# Altium PCB TinyTOF-Body.PcbDoc (part 3 of 3)
Units mil, origin at the board's own origin, x right, y up, seen from the top; angles counter-clockwise.
Board outline 6000 x 4000 mil, 6 copper layers (Component Side, Ground Plane (GND), Inner Layer 1, Inner Layer 2, Power Plane (VCC), Solder Side), stack 62.6 mil thick; 146 components, 158 nets, 1020 pads, 350 vias.
Unrouted connection lines stored in the file: 339.
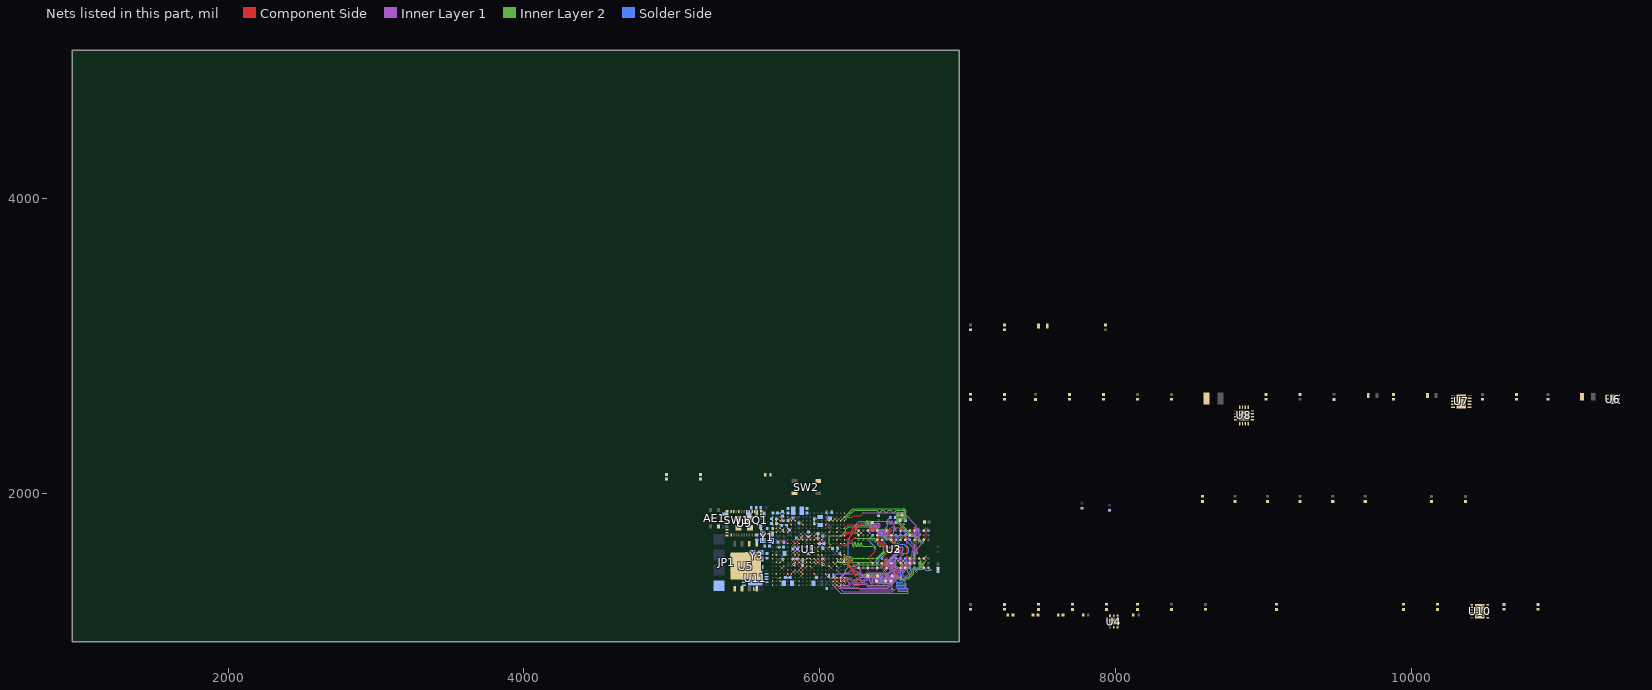
[diagram p7: the nets of this part, all layers, seen from the top]

## Via types
v1: diameter 12, hole 6, Component Side to Solder Side, tented both sides, 330 vias
v2: diameter 19.68, hole 7.87, Component Side to Solder Side, 12 vias
v3: diameter 19.68, hole 11.81, Component Side to Solder Side, 5 vias
v4: diameter 12, hole 6, Component Side to Solder Side, 3 vias

## Nets (pads, with @x,y where several pads share a name; then routed paths per layer and width w, separated by ;. In a path a pad name is that pad's centre, name@x,y a point inside that pad or via, vN(x,y) a via of type N, cw(c..) or ccw(c..) an arc to the next point about the centre after c; other vN are vias at no path point) (continued)
DRAM_D25: U1.B3 U3.F7 | length 911.7
  Component Side w5: U1.B3@6116.93,1407.48 v1(6129.73,1394.68)
  Inner Layer 1 w5: v1(6129.73,1394.68) 6135.72,1394.68 6158.22,1372.18 6197.18,1372.18 6221.5,1396.5 6313.91,1396.5 6329.91,1380.5 6458.23,1380.5 6529,1451.27 6529,1464.41 6546.09,1481.5 6556.5,1481.5 6580,1505 6580,1565 cw(c6585,1565) 6585,1570 cw(c6585,1565) 6590,1565 6590,1540 ccw(c6595,1540) 6595,1535 ccw(c6595,1540) 6600,1540 6600,1565 cw(c6605,1565) 6605,1570 cw(c6605,1565) 6610,1565 6610,1550 ccw(c6615,1550) 6615,1545 ccw(c6615,1550) 6620,1550 6620,1577.32 6627.5,1584.82 6627.5,1610.63 6633.5,1616.63 6633.5,1637.5 6630,1641 v1(6630,1640)
  Solder Side w5: U3.F7@6578.74,1687.99 6579.69,1687.99 6627.68,1640 v1(6630,1640)
DRAM_D26: U1.A3 U3.G2 | length 900
  Component Side w5: U1.A3@6116.93,1381.89 6116.93,1381.57 6133.5,1365 v1(6135,1365)
  Inner Layer 1 w5: v1(6135,1365) 6135,1363.5 6161,1337.5 6492.5,1337.5 v1(6515,1360)
  Solder Side w5: v1(6515,1360) 6580,1360 ccw(c6580,1365) 6585,1365 ccw(c6580,1365) 6580,1370 6524,1370 cw(c6524,1375) 6519,1375 cw(c6524,1375) 6524,1380 6580,1380 ccw(c6580,1385) 6585,1385 ccw(c6580,1385) 6580,1390 6525,1390 cw(c6525,1395) 6520,1395 cw(c6525,1395) 6525,1400 6555.19,1400 6572.5,1417.31 6572.5,1445.18 6563.97,1453.71 6563.97,1513.78 U3.G2@6547.24,1530.51
DRAM_D27: U1.C2 U3.H7 | length 884.7
  Component Side w5: U1.C2@6142.52,1433.07 v1(6155.32,1420.27)
  Inner Layer 1 w5: v1@6155,1420 6155,1415 6150,1410 6145,1410 6142.23,1412.77 6142.23,1427.23 6172.5,1457.5 6272.5,1457.5 6295,1435 6305,1435 6327.5,1457.5 6470.58,1457.5 6495,1481.92 6495,1540 cw(c6500,1540) 6500,1545 cw(c6500,1540) 6505,1540 6505,1505 ccw(c6510,1505) 6510,1500 ccw(c6510,1505) 6515,1505 6515,1555 6520,1560 6533.49,1560 6548.95,1575.46 6548.95,1575.73 6563.22,1590 v1(6565,1590)
  Solder Side w5: U3.H7@6515.75,1687.99 6515.75,1664.25 6522.78,1657.22 6570.1,1657.22 6584.82,1642.5 6597.5,1642.5 6602.5,1637.5 6602.5,1607.5 6592.5,1597.5 6569.82,1597.5 6565,1592.68 v1(6565,1590)
DRAM_D28: U1.A2 U3.H3 | length 896.6
  Component Side w5: U1.A2@6142.52,1381.89 6156.91,1367.5 6257.5,1367.5 v1(6275,1350)
  Inner Layer 1 w5: v1(6275,1350) 6485,1350 v1(6490,1355) v1@6492.32,1355
  Solder Side w5: v1@6492.32,1355 v1(6490,1355) 6490,1390 ccw(c6485,1390) 6485,1395 6415,1395 cw(c6415,1400) 6410,1400 cw(c6415,1400) 6415,1405 6488.5,1405 ccw(c6488.5,1410) 6493.5,1410 ccw(c6488.5,1410) 6488.5,1415 6415,1415 cw(c6415,1420) 6410,1420 cw(c6415,1420) 6415,1425 6475,1425 6510,1460 6510,1480 6500,1490 6500,1542.27 6515.75,1558.02 U3.H3@6515.75,1562.01
DRAM_D29: U1.C5 U3.H8 | length 886
  Component Side w5: U1.C5@6065.75,1433.07 v1(6078.54,1420.27)
  Inner Layer 1 w5: v1(6078.54,1420.27) 6078.54,1428.54 6083.37,1433.37 6135.64,1433.37 6168.77,1466.5 6196.5,1466.5 6207.5,1477.5 6247.5,1477.5 6257.5,1467.5 6275.23,1467.5 6297.73,1445 6302.27,1445 6323.77,1466.5 6466.85,1466.5 6485,1484.65 6485,1520 ccw(c6480,1520) 6480,1525 ccw(c6480,1520) 6475,1520 cw(c6470,1520) 6470,1515 ccw(c6470,1510) 6465,1510 6465,1500 cw(c6460,1500) 6460,1495 cw(c6460,1500) 6455,1500 6455,1516.87 6522.63,1584.5 6531.28,1593.14 6548.55,1593.14 6562.5,1607.09 6562.5,1619.82 6565.23,1622.55 6565.23,1632.91 6557.91,1640.23 6539.77,1640.23 6530,1650 6530,1665 v1(6535,1670)
  Solder Side w5: U3.H8@6515.75,1719.49 6532.48,1702.76 6532.48,1672.52 v1(6535,1670)
DRAM_D30: U1.B4 U3.F8 | length 909.9
  Component Side w5: U1.B4@6091.34,1407.48 v1(6104.13,1394.68)
  Inner Layer 1 w5: v1(6104.13,1394.68) 6121.32,1377.5 6140.18,1377.5 6155.18,1362.5 6465.68,1362.5 6547.5,1444.32 6547.5,1447.04 6567.5,1467.04 6647.5,1547.04 6647.5,1605.18 6652.5,1610.18 6652.5,1702.31 6630,1724.81 v1(6630,1735)
  Solder Side w5: U3.F8@6578.74,1719.49 6594.25,1735 v1(6630,1735)
DRAM_D31: U1.A4 U3.F2 | length 898.4
  Component Side w5: U1.A4@6091.34,1381.89 v1(6104.13,1369.09)
  Inner Layer 1 w5: v1(6104.13,1369.09) 6144.73,1328.5 6593.5,1328.5 ccw(c6593.5,1335) 6600,1335 ccw(c6595,1335) 6595,1340 6535,1340 cw(c6535,1345) 6530,1345 cw(c6535,1345) 6535,1350 6595,1350 ccw(c6595,1355) 6600,1355 ccw(c6595,1355) 6595,1360 6585,1360 cw(c6585,1365) 6580,1365 6580,1435 v1(6605,1460)
  Solder Side w5: U3.F2@6578.74,1530.51 6595.47,1513.78 6595.47,1469.53 v1(6605,1460)
DRAM_DQM0: U1.N1 U2.E7 | length 829.4
  Component Side w5: U1.N1@6168.11,1688.98 6168.11,1687.5 6186.64,1687.5 6204.71,1705.57 6204.71,1710.06 6245,1750.36 v1(6245,1755) ; v1(6590,1655) 6593.5,1651.5 6593.5,1578.74 U2.E7@6610.24,1562.01
  Inner Layer 1 w5: v1(6245,1755) 6251.5,1761.5 6251.5,1798.77 6267.23,1814.5 6450.5,1814.5 cw(c6450.5,1810) 6455,1810 6455,1800 ccw(c6460,1800) 6460,1795 ccw(c6460,1800) 6465,1800 6465,1809.5 cw(c6470,1809.5) 6470,1814.5 cw(c6470,1809.5) 6475,1809.5 6475,1800 ccw(c6480,1800) 6480,1795 ccw(c6480,1800) 6485,1800 6485,1809.5 cw(c6490,1809.5) 6490,1814.5 cw(c6490,1809.5) 6495,1809.5 6495,1800 ccw(c6500,1800) 6500,1795 cw(c6500,1790) 6505,1790 6505,1782.68 6507.5,1780.18 6507.5,1769.82 6505,1767.32 6505,1760 ccw(c6510,1760) 6510,1755 ccw(c6510,1760) 6515,1760 6515,1765 cw(c6520,1765) 6520,1770 6545.43,1770 6603.5,1711.93 6603.5,1698.34 6590,1684.84 v1(6590,1655)
DRAM_DQM1: U1.G2 U2.D3 | length 804.6
  Component Side w5: U1.G2@6142.52,1535.43 v1(6155.32,1522.64) ; v1(6640,1665) 6640,1685.18 U2.D3@6641.73,1686.91 ; U2.D3@6641.73,1682.64 U2.D3@6641.73,1686.91 ; U2.D3@6641.73,1687.99 U2.D3@6641.73,1686.91 ; U2.D3@6644.82,1690 U2.D3@6641.73,1686.91
  Inner Layer 2 w5: v1(6155.32,1522.64) 6197.32,1522.64 6209.82,1510.14 6220.18,1510.14 6229.54,1519.5 6434.5,1519.5 ccw(c6434.5,1525) 6440,1525 6440,1550 cw(c6445,1550) 6445,1555 cw(c6445,1550) 6450,1550 6450,1525 ccw(c6455,1525) 6455,1520 ccw(c6455,1525) 6460,1525 6460,1550 cw(c6465,1550) 6465,1555 cw(c6465,1550) 6470,1550 6470,1525 ccw(c6475,1525) 6475,1520 6507.82,1520 6507.82,1519.5 6524.82,1502.5 6571.59,1502.5 6645,1575.91 6645,1665 v1@6642.5,1665 ; v1(6640,1665) v1@6642.5,1665 ; v1@6642.68,1665.18 v1@6642.5,1665
DRAM_DQM2: U1.W1 U3.D3 | length 936.4
  Component Side w5: U1.W1@6168.11,1842.52 6222.5,1842.52 6222.5,1845.18 6229.82,1852.5 6277.5,1852.5 v1(6295,1870)
  Inner Layer 1 w5: v1(6295,1870) 6570,1870 6655,1785 6655,1765 cw(c6650,1765) 6650,1760 ccw(c6650,1755) 6645,1755 6645,1725 ccw(c6650,1725) 6650,1720 ccw(c6650,1725) 6655,1725 6655,1745 cw(c6660,1745) 6660,1750 ccw(c6660,1755) 6665,1755 6665,1760 cw(c6670,1760) 6670,1765 cw(c6670,1761) 6674,1761 6674,1744 cw(c6670,1744) 6670,1740 ccw(c6670,1735) 6665,1735 ccw(c6670,1735) 6670,1730 6680,1730 cw(c6680,1725) 6685,1725 cw(c6680,1725) 6680,1720 6670,1720 ccw(c6670,1715) 6665,1715 ccw(c6670,1715) 6670,1710 cw(c6670,1705) 6675,1705 6675,1682.32 6687.15,1670.18 6687.15,1659.82 6679.82,1652.5 6677.5,1650.18 6677.5,1644.82 6661.5,1628.82 6661.5,1601.5 v1(6660,1600)
  Solder Side w5: U3.D3@6641.73,1562.01 6641.73,1581.73 v1(6660,1600)
DRAM_DQM3: U1.C1 U3.E7 | length 888.3
  Component Side w5: U1.C1@6168.11,1433.07 6206.18,1395 6225,1395 6240,1410 6255,1410 cw(c6255,1405) 6260,1405 cw(c6255,1405) 6255,1400 6245,1400 ccw(c6245,1395) 6240,1395 ccw(c6245,1395) 6245,1390 6270,1390 cw(c6270,1385) 6275,1385 cw(c6270,1385) 6270,1380 v1(6230,1380)
  Inner Layer 1 w5: v1(6230,1380) 6237.5,1387.5 6310.18,1387.5 6326.18,1371.5 6461.96,1371.5 6538,1447.54 6538,1460.68 6549.82,1472.5 6560.18,1472.5 ; 6560.2,1472.47 6636.5,1548.77 6636.5,1606.91 6642.5,1612.91 6642.5,1645.18 6635.18,1652.5 6634.82,1652.5 6623.6,1663.72 v1(6623.6,1673.6)
  Solder Side w5: U3.E7@6610.24,1687.99 6610.24,1684.64 6623.6,1671.28 v1(6623.6,1673.6)
DRAM_DQS0_N: U1.P2 U2.G3 | length 813.4
  Component Side w5: U1.P2@6142.52,1714.57 6151.96,1714.57 6164.89,1727.5 6171.6,1727.5 6184.1,1740 6207.77,1740 6222.5,1754.73 6222.5,1764.32 6235.68,1777.5 6246.04,1777.5 6265.04,1796.5 6276.5,1796.5 v1(6280,1800) ; U2.G3@6547.24,1687.99 6547.62,1687.62 v1(6565,1705)
  Inner Layer 1 w5: v1(6280,1800) 6293.5,1786.5 6305.59,1786.5 6309.09,1790 6395,1790 cw(c6395,1785) 6400,1785 cw(c6395,1785) 6395,1780 6350,1780 ccw(c6350,1765) 6335,1765 ccw(c6350,1765) 6350,1750 6455,1750 cw(c6455,1745) 6460,1745 cw(c6455,1745) 6455,1740 6405,1740 ccw(c6405,1725) 6390,1725 ccw(c6405,1725) 6405,1710 6560,1710 v1(6565,1705)
DRAM_DQS0_P: U1.P1 U2.F3 | length 808.7
  Component Side w5: U1.P1@6168.11,1714.57 6172.81,1714.57 6188.25,1730 6211.92,1730 6232.5,1750.58 6232.5,1760.18 6239.82,1767.5 6250.18,1767.5 6269.18,1786.5 6286.5,1786.5 v1(6300,1800) ; U2.F3@6578.74,1687.99 6578.74,1691.26 6590,1702.52 v1(6590,1704.91)
  Inner Layer 1 w5: v1(6300,1800) 6395,1800 cw(c6395,1785) 6410,1785 cw(c6395,1785) 6395,1770 6350,1770 ccw(c6350,1765) 6345,1765 ccw(c6350,1765) 6350,1760 6455,1760 cw(c6455,1745) 6470,1745 cw(c6455,1745) 6455,1730 6405,1730 ccw(c6405,1725) 6400,1725 ccw(c6405,1725) 6405,1720 6571.32,1720 6587.8,1703.52 6590,1705.72 v1(6590,1704.91)
DRAM_DQS1_N: U1.H1 U2.B7 | length 781.4
  Component Side w5: U1.H1@6168.11,1561.02 6200,1529.13 6200,1519.96 6222.5,1497.46 6222.5,1484.82 6248.82,1458.5 6250.59,1458.5 6263,1446.09 6263,1445 v1(6265,1445) ; U2.B7@6704.72,1562.01 6716.73,1550 v1(6720,1550)
  Inner Layer 2 w5: v1@6267.47,1447.47 v1(6265,1445) 6275,1435 6525.05,1435 6547.55,1412.5 6574.32,1412.5 6586.64,1424.82 6602.14,1424.82 6637.5,1460.18 6637.5,1487.5 6640,1490 6690.81,1490 ccw(c6690.81,1505) 6705.81,1505 ccw(c6690.81,1505) 6690.81,1520 6685,1520 cw(c6685,1525) 6680,1525 cw(c6685,1525) 6685,1530 6700,1530 v1(6720,1550)
DRAM_DQS1_P: U1.G1 U2.C7 | length 774.2
  Component Side w5: U1.G1@6168.11,1535.43 6212.5,1491.04 6212.5,1477.5 v1(6245,1445) ; U2.C7@6673.23,1562.01 6685.24,1550 v1(6690,1550)
  Inner Layer 2 w5: v1(6245,1445) 6245.91,1445 6259.41,1458.5 6270.59,1458.5 6284.09,1445 6295,1445 6308.5,1458.5 6325.64,1458.5 6340,1444.14 6349.14,1444.14 6363.5,1458.5 6379.14,1458.5 6392.64,1445 6405,1445 6418.5,1458.5 6434.14,1458.5 6447.64,1445 6529.19,1445 6551.69,1422.5 6570.18,1422.5 6582.5,1434.82 6598,1434.82 6627.5,1464.32 6627.5,1491.64 6635.86,1500 6690.81,1500 ccw(c6690.81,1505) 6695.81,1505 ccw(c6690.81,1505) 6690.81,1510 6685,1510 cw(c6685,1525) 6670,1525 cw(c6685,1525) 6685,1540 ccw(c6685,1545) 6690,1545 v1(6690,1550)
DRAM_DQS2_N: U1.V2 U3.B7 | length 950.3
  Component Side w5: U1.V2@6142.52,1816.93 v1(6155.32,1829.73)
  Inner Layer 2 w5: v1(6155.32,1829.73) 6223.59,1898 6567,1898 cw(c6567,1880) 6585,1880 cw(c6570,1880) 6570,1865 6535,1865 ccw(c6535,1860) 6530,1860 ccw(c6535,1860) 6535,1855 6570,1855 cw(c6570,1840) 6585,1840 cw(c6570,1840) 6570,1825 6535,1825 ccw(c6535,1820) 6530,1820 6530,1816.87 ; 6530.93,1815.94 6530,1816.87 ; v1(6700,1665) 6642.5,1722.5 6624.37,1722.5 6611.08,1735.79 6543.44,1803.43 6530,1816.87
  Solder Side w5: v1(6700,1665) 6698.27,1665 6704.72,1671.46 U3.B7@6704.72,1687.99
DRAM_DQS2_P: U1.V1 U3.C7 | length 944.8
  Component Side w5: U1.V1@6168.11,1816.93 v1(6180.91,1829.73)
  Inner Layer 2 w5: v1(6180.91,1829.73) 6180.91,1841.17 6189.73,1850 6197.27,1850 6203.64,1856.36 6203.64,1863.9 6209.87,1870.13 6217.13,1870.13 6235,1888 6387,1888 6400,1875 6410,1875 6423,1888 6432,1888 6445,1875 6456.25,1875 6469.25,1888 6480,1888 6493,1875 6505,1875 6518,1888 6567,1888 cw(c6567,1880) 6575,1880 cw(c6570,1880) 6570,1875 6535,1875 ccw(c6535,1860) 6520,1860 ccw(c6535,1860) 6535,1845 6570,1845 cw(c6570,1840) 6575,1840 cw(c6570,1840) 6570,1835 6535,1835 ccw(c6535,1820) 6520,1820 6520,1812.73 6536.36,1796.36 6606.94,1725.79 6620.23,1712.5 6638.36,1712.5 6674.65,1676.21 v1(6674.65,1665)
  Solder Side w5: U3.C7@6673.23,1687.99 6667.57,1687.99 6674.65,1680.91 v1(6674.65,1665)
DRAM_DQS3_N: U1.B1 U3.G3 | length 897.1
  Component Side w5: U1.B1@6168.11,1407.48 v1(6180.91,1394.68)
  Inner Layer 1 w5: v1(6180.91,1394.68) 6167.82,1407.78 6167.82,1425.45 6177.36,1435 6190,1435 6192.5,1432.5 6209.57,1432.5 6227.07,1415 6235.86,1415 6253.36,1432.5 6269.14,1432.5 6286.14,1415.5 6295,1415.5 6304.5,1425 6314.71,1425 ccw(c6314.71,1430) 6319.71,1430 ; 6320,1430 cw(c6335,1430) 6335,1445 cw(c6335,1430) 6350,1430 6350,1405 ccw(c6355,1405) 6355,1400 ccw(c6355,1405) 6360,1405 6360,1430 cw(c6375,1430) 6375,1445 cw(c6375,1430) 6390,1430 6390,1405 ccw(c6395,1405) 6395,1400 ccw(c6395,1405) 6400,1405 6400,1430 cw(c6415,1430) 6415,1445 cw(c6415,1430) 6430,1430 6430,1405 ccw(c6435,1405) 6435,1400 ccw(c6435,1405) 6440,1405 6440,1430 cw(c6455,1430) 6455,1445 cw(c6455,1430) 6470,1430 ccw(c6475,1430) 6475,1425 6480,1430 6480,1450 6484.24,1454.24 6504.24,1454.24 6510,1460 6510,1484.14 6520.86,1495 6530,1495 6535,1500 6537.93,1502.93 6547.93,1502.93 6555,1510 6555,1520 6546.21,1528.79 6546.21,1540.36 6551.5,1545.64 6551.5,1550.59 6557.95,1557.05 6557.95,1562.05 ccw(c6555,1562.05) 6555,1565 6551.22,1565 6531.35,1545.14 6529.86,1545.14 v1(6530,1545)
  Solder Side w5: v1(6530,1545) 6530.24,1545 U3.G3@6547.24,1562.01
DRAM_DQS3_P: U1.B2 U3.F3 | length 896.5
  Component Side w5: U1.B2@6142.52,1407.48 v1(6155.32,1394.68)
  Inner Layer 1 w5: v1(6155.32,1394.68) 6155.32,1387.82 6161.95,1381.18 6191.18,1381.18 6200,1390 6200,1394.68 6177.82,1416.87 6177.82,1421.31 6181.51,1425 6185.86,1425 6188.36,1422.5 6202.5,1422.5 6219.5,1405.5 6240.5,1405.5 6257.5,1422.5 6265,1422.5 6282,1405.5 6300.5,1405.5 6308.46,1413.46 6318.46,1413.46 ccw(c6318.46,1425) 6330,1425 6330,1430 cw(c6335,1430) 6335,1435 cw(c6335,1430) 6340,1430 6340,1405 ccw(c6355,1405) 6355,1390 ccw(c6355,1405) 6370,1405 6370,1430 cw(c6375,1430) 6375,1435 cw(c6375,1430) 6380,1430 6380,1405 ccw(c6395,1405) 6395,1390 ccw(c6395,1405) 6410,1405 6410,1430 cw(c6415,1430) 6415,1435 cw(c6415,1430) 6420,1430 6420,1405 ccw(c6435,1405) 6435,1390 ccw(c6435,1405) 6450,1405 6450,1430 cw(c6455,1430) 6455,1435 cw(c6455,1430) 6460,1430 ccw(c6475,1430) 6475,1415 6480,1415 6520,1455 6520,1480 6525,1485 6535,1485 6542.93,1492.93 6552.07,1492.93 6565,1505.86 6565,1524.14 6556.21,1532.93 6556.21,1536.21 v1(6565,1545)
  Solder Side w5: v1(6565,1545) 6578.74,1558.74 U3.F3@6578.74,1562.01
DRAM_RAS: U1.J1 U2.J3 U3.J3 | length 644
  Component Side w5: U1.J1@6168.11,1586.61 6168.7,1586.61 6235,1520.31 v1(6235,1490) ; U2.J3@6484.25,1687.99 6484.25,1676.15 6525,1635.41 v1(6525,1625)
  Inner Layer 1 w5: v1(6235,1490) 6244.02,1499.02 6411.69,1499.02 6437,1524.32 6515.18,1602.5 6522.5,1609.82 6522.5,1622.5 v1(6525,1625)
  Solder Side w5: U3.J3@6484.25,1562.01 6490.02,1567.78 6500.63,1567.78 6525,1592.14 v1(6525,1625)
DRAM_RESET: R9.2 U1.D4 U2.T2 U3.T2 | length 516.4
  Component Side w5: U1.D4@6091.34,1458.66 v1(6104.13,1445.87) ; v1(6250,1735) 6255,1735 6263.78,1726.22 U2.T2@6263.78,1719.49
  Solder Side w5: v1(6104.13,1445.87) 6116.63,1458.37 6168.37,1458.37 6177.5,1467.5 6177.5,1485.18 6195,1502.68 ; v1(6250,1735) 6229.64,1735 6204.82,1710.18 6204.82,1699.82 6192.5,1687.5 6192.5,1644.82 6195,1642.32 6195,1502.68 ; U3.T2@6263.78,1530.51 6243.4,1510.14 6202.46,1510.14 6195,1502.68
DRAM_SDBA0: U1.G4 U2.M2 U3.M2 | length 644.5
  Component Side w5: U1.G4@6091.34,1535.43 v1(6104.13,1522.64) ; U2.M2@6389.76,1719.49 6405,1704.25 6405,1676.87 6450,1631.87 v1(6450,1615)
  Inner Layer 2 w5: v1(6104.13,1522.64) 6116.63,1535.14 6214.77,1535.14 6217.13,1537.5 6374.12,1537.5 6450.81,1614.19 v1(6450,1615)
  Solder Side w5: U3.M2@6389.76,1530.51 6405,1545.75 6405,1569.59 6446.91,1611.5 6449.87,1611.5 6450,1611.63 v1(6450,1615)
DRAM_SDBA1: U1.M2 U2.N8 U3.N8 | length 626.6
  Component Side w5: U1.M2@6142.52,1663.39 6142.52,1662.48 6155,1650 6187.32,1650 6203.32,1666 6213.27,1666 6225,1677.73 v1(6225,1675) ; U2.N8@6358.27,1530.51 6341.54,1547.24 6341.54,1576.54 6375,1610 v1(6375,1630)
  Inner Layer 2 w5: v1(6225,1675) 6225,1647.5 ccw(c6230,1647.5) 6230,1642.5 ccw(c6230,1647.5) 6235,1647.5 6235,1665 cw(c6240,1665) 6240,1670 cw(c6240,1665) 6245,1665 6245,1650 ccw(c6250,1650) 6250,1645 ccw(c6250,1650) 6255,1650 6255,1660 cw(c6260,1660) 6260,1665 cw(c6260,1660) 6265,1660 6265,1650 ccw(c6270,1650) 6270,1645 ccw(c6270,1650) 6275,1650 6275,1660 cw(c6280,1660) 6280,1665 cw(c6280,1660) 6285,1660 6285,1650 ccw(c6290,1650) 6290,1645 6360,1645 v1(6375,1630)
  Solder Side w5: U3.N8@6358.27,1719.49 6341.54,1702.76 6341.54,1673.46 6375,1640 v1(6375,1630)
DRAM_SDBA2: U1.J2 U2.M3 U3.M3 | length 639.8
  Component Side w5: U1.J2@6142.52,1586.61 v1(6155.32,1573.82) ; U2.M3@6389.76,1687.99 6389.76,1675.24 6413.5,1651.5 6413.91,1651.5 6426.5,1638.91 6426.5,1638.5 6434.59,1630.41 v1(6434.59,1629.59)
  Inner Layer 2 w5: v1(6155.32,1573.82) 6171.18,1573.82 cw(c6171.18,1570) 6175,1570 6175,1550 ccw(c6180,1550) 6180,1545 ccw(c6180,1550) 6185,1550 6185,1570 cw(c6190,1570) 6190,1575 cw(c6190,1570) 6195,1570 6195,1550 ccw(c6200,1550) 6200,1545 ccw(c6200,1550) 6205,1550 6205,1570 cw(c6210,1570) 6210,1575 cw(c6210,1570) 6215,1570 6215,1551.5 ccw(c6220,1551.5) 6220,1546.5 ccw(c6220,1551.5) 6225,1551.5 6225,1560 cw(c6230,1560) 6230,1565 6388.89,1565 6435,1611.11 6434.59,1611.51 v1(6434.59,1629.59)
  Solder Side w5: U3.M3@6389.76,1562.01 6389.76,1567.09 6435,1612.32 6434.59,1612.73 v1(6434.59,1629.59)
DRAM_SDCKE: R8.2 U1.L5 U2.K9 U3.K9 | length 1095.4
  Component Side w5: U1.L5@6065.75,1637.8 v1(6078.54,1650.59) ; U2.K9@6452.76,1499.02 6452.76,1507.24 6437.99,1522.01 6437.99,1582.99 6448.5,1593.5 6458.91,1593.5 6467.91,1602.5 6520.18,1602.5 6532.68,1615 v1(6540,1615)
  Inner Layer 2 w5: v1(6078.54,1650.59) 6066.04,1663.09 6066.04,1706.95 6073.37,1714.27 6133.87,1714.27 6134.46,1714.86 6147.63,1714.86 6178.5,1745.73 6178.5,1758.91 6196.09,1776.5 6363.91,1776.5 6449.18,1691.22 6469.18,1691.22 6520.91,1639.5 6533.18,1639.5 6540,1632.68 v1(6540,1615)
  Solder Side w5: U3.K9@6452.76,1750.98 6452.76,1742.76 6436.03,1726.03 6436.03,1668.97 6462.5,1642.5 6525.18,1642.5 6540,1627.68 v1(6540,1615)
DRAM_SDODT: U1.T1 U2.K1 U3.K1 | length 1022.7
  Component Side w5: U1.T1@6168.11,1765.75 6192.36,1790 v1(6230,1790) ; U2.K1@6452.76,1750.98 6452.76,1747.24 6469.48,1730.52 6469.48,1713.37 6480.1,1702.76 6490.37,1702.76 6499.74,1693.38 6499.74,1680.71 v1(6552.73,1627.73)
  Inner Layer 1 w5: v1(6445,1480) 6445,1519.59 6446,1520.59 6518.91,1593.5 6527.91,1602.5 6545.18,1602.5 6552.73,1610.05 v1(6552.73,1627.73)
  Inner Layer 2 w5: v1(6230,1790) 6234.5,1785.5 6240,1785.5 6249,1794.5 6255,1794.5 6264,1785.5 6310.5,1785.5 ccw(c6310.5,1790) 6315,1790 6315,1811 cw(c6320,1811) 6320,1816 cw(c6320,1811) 6325,1811 6325,1790.5 ccw(c6330,1790.5) 6330,1785.5 ccw(c6330,1790.5) 6335,1790.5 6335,1810 cw(c6340,1810) 6340,1815 cw(c6340,1810) 6345,1810 6345,1790.5 ccw(c6350,1790.5) 6350,1785.5 6350.5,1785.5 ccw(c6350.5,1790) 6355,1790 6355,1805 cw(c6360,1805) 6360,1810 cw(c6360,1804.37) 6365.63,1804.37 6365.63,1789.87 ccw(c6370,1789.87) 6370,1785.5 6379.5,1785.5 6385.5,1779.5 6385.5,1769.5 6451,1704 6469.13,1704 6524.63,1648.5 6536.91,1648.5 6555,1630.41 6552.73,1628.13 v1(6552.73,1627.73)
  Solder Side w5: v1(6445,1480) 6452.76,1487.76 U3.K1@6452.76,1499.02 ; v1(6552.73,1627.73) 6552.73,1628.13 v1@6555,1630.41
DRAM_WE: U1.M1 U2.L3 U3.L3 | length 627.5
  Component Side w5: U1.M1@6168.11,1663.39 6187.98,1663.39 6199.59,1675 6205,1675 6230,1700 v1(6245,1700) ; U2.L3@6421.26,1687.99 6421.26,1673.33 6457.09,1637.5 6470.18,1637.5 6480,1627.68 v1(6480,1615)
  Inner Layer 2 w5: v1(6245,1700) 6370,1700 cw(c6370,1695) 6375,1695 6375,1680 ccw(c6380,1680) 6380,1675 ccw(c6380,1680) 6385,1680 6385,1695 cw(c6390,1695) 6390,1700 cw(c6390,1695) 6395,1695 6395,1655 6405,1645 6439.59,1645 6446.09,1638.5 6469.18,1638.5 6480,1627.68 v1(6480,1615)
  Solder Side w5: U3.L3@6421.26,1562.01 6422.84,1563.59 6422.84,1574.71 6450.63,1602.5 6455.18,1602.5 6464.18,1611.5 6476.5,1611.5 v1(6480,1615)
GND: C1.1 C2.1 C3.1 C4.1 C5.1 C6.1 C7.1 C8.1 C9.1 C10.1 C11.1 C12.1 C13.1 C14.1 C15.1 C16.1 C17.1 C18.1 C19.1 C20.1 C21.1 C22.1 C23.1 C24.1 C25.1 C26.1 C27.1 C28.1 C29.1 C30.1 C31.1 C32.1 C33.1 C34.1 C35.1 C36.1 C37.1 C38.1 C39.1 C40.1 C41.1 C42.1 C43.1 C44.1 C45.1 C46.1 C47.1 C48.1 C49.1 C50.1 C51.1 C52.1 C53.1 C54.1 C55.1 C56.1 C57.1 C58.1 C59.1 C60.1 C61.1 C62.1 C63.1 C64.1 C65.2 C66.1 C67.1 C68.1 C69.1 C70.1 C71.1 C72.1 C73.1 C74.2 C75.2 C76.1 C77.2 C78.2 C79.1 C80.1 C81.1 C82.1 C83.1 C84.1 C85.1 C86.1 C87.1 JP1.GND JP1.MT1 Q1.2 R3.1 R6.1 R7.2 R8.1 R9.1 R11.1 R12.1 R13.2 R24.1 R25.1 R28.1 R31.1 R32.1 R33.1 R34.1 SW2.3 U1.A1 U1.A20 U1.C3 U1.C4 U1.C18 U1.D6 U1.D9 U1.D12 U1.D15 U1.E3 U1.F3 U1.F5 U1.F17 U1.G7 U1.G8 U1.G9 U1.G10 U1.G11 U1.G12 U1.G13 U1.G14 U1.G18 U1.G19 U1.H3 U1.H7 U1.H14 U1.H17 U1.H20 U1.J7 U1.J14 U1.J17 U1.J19 U1.J20 U1.K3 U1.K10 U1.K11 U1.K14 U1.L3 U1.L7 U1.L10 U1.L11 U1.L14 U1.M7 U1.M14 U1.M16 U1.M17 U1.M20 U1.N3 U1.N7 U1.N13 U1.P7 U1.P8 U1.P9 U1.P10 U1.P11 U1.P12 U1.R3 U1.R5 U1.R17 U1.R19 U1.R20 U1.T3 U1.T16 U1.U6 U1.U9 U1.U12 U1.U15 U1.U19 U1.U20 U1.V3 U1.V4 U1.V14 U1.V15 U1.V18 U1.W18 U1.Y1 U1.Y18 U1.Y20 U2.A9 U2.B1 U2.B3 U2.B9 U2.D1 U2.D8 U2.E1 U2.E2 U2.E8 U2.F9 U2.G1 U2.G8 U2.G9 U2.J2 U2.J8 U2.M1 U2.M9 U2.P1 U2.P9 U2.T1 U2.T9 U3.A9 U3.B1 U3.B3 U3.B9 U3.D1 U3.D8 U3.E1 U3.E2 U3.E8 U3.F9 U3.G1 U3.G8 U3.G9 U3.J2 U3.J8 U3.M1 U3.M9 U3.P1 U3.P9 U3.T1 U3.T9 U4.5 U4.7@7990,1135 U5.4 U5.9 U6.2 U6.6 U6.7@11365,2640 U7.5 U7.11 U8.6 U8.7 U8.8 U8.15 U8.16 U8.17@8870,2530 U9.1 U9.12 U9.14 U9.19 U9.21 U9.29 U9.32 U9.33 U9.35 U9.37 U9.40 U9.42 U9.43 U10.5 U10.13 U11.25 Y1.2 Y3.2 | length 2798
  Component Side w5: v1(5720.27,1420.27) U1.C18@5733.07,1433.07 ; v1(5720.27,1522.64) U1.G18@5733.07,1535.43 ; v1(5720.27,1829.73) U1.V18@5733.07,1816.93 ; v1(5745.87,1497.05) U1.F17@5758.66,1509.84 ; v1(5745.87,1548.23) U1.H17@5758.66,1561.02 ; v1(5745.87,1573.82) U1.J17@5758.66,1586.61 ; v1(5745.87,1676.18) U1.M17@5758.66,1663.39 ; v1(5745.87,1752.95) U1.R17@5758.66,1740.16 ; v1(5771.46,1676.18) U1.M16@5784.25,1663.39 ; v1(5771.46,1778.54) U1.T16@5784.25,1765.75 ; v1(5797.05,1445.87) U1.D15@5809.84,1458.66 ; v1(5797.05,1804.13) U1.U15@5809.84,1791.34 ; v1(5797.05,1829.73) U1.V15@5809.84,1816.93 ; v1(5822.64,1522.64) U1.G14@5835.43,1535.43 ; v1(5822.64,1548.23) U1.H14@5835.43,1561.02 ; v1(5822.64,1573.82) U1.J14@5835.43,1586.61 ; v1(5822.64,1599.41) U1.K14@5835.43,1612.2 ; v1(5822.64,1650.59) U1.L14@5835.43,1637.8 ; v1(5822.64,1676.18) U1.M14@5835.43,1663.39 ; v1(5822.64,1829.73) U1.V14@5835.43,1816.93 ; v1(5848.23,1522.64) U1.G13@5861.02,1535.43 ; v1(5848.23,1701.77) U1.N13@5861.02,1688.98 ; v1(5873.82,1445.87) U1.D12@5886.61,1458.66 ; v1(5873.82,1522.64) U1.G12@5886.61,1535.43 ; v1(5873.82,1727.36) U1.P12@5886.61,1714.57 ; v1(5873.82,1804.13) U1.U12@5886.61,1791.34 ; v1(5899.41,1522.64) U1.G11@5912.2,1535.43 ; v1(5899.41,1599.41) U1.K11@5912.2,1612.2 ; v1(5899.41,1650.59) U1.L11@5912.2,1637.8 ; v1(5899.41,1727.36) U1.P11@5912.2,1714.57 ; U1.G10@5937.8,1535.43 v1(5950.59,1522.64) ; U1.K10@5937.8,1612.2 v1(5950.59,1599.41) ; U1.L10@5937.8,1637.8 v1(5950.59,1650.59) ; U1.P10@5937.8,1714.57 v1(5950.59,1727.36) ; U1.D9@5963.39,1458.66 v1(5976.18,1445.87) ; U1.G9@5963.39,1535.43 v1(5976.18,1522.64) ; U1.P9@5963.39,1714.57 v1(5976.18,1727.36) ; U1.U9@5963.39,1791.34 v1(5976.18,1804.13) ; U1.G8@5988.98,1535.43 v1(6001.77,1522.64) ; U1.P8@5988.98,1714.57 v1(6001.77,1727.36) ; U1.G7@6014.57,1535.43 v1(6027.36,1522.64) ; U1.H7@6014.57,1561.02 v1(6027.36,1548.23) ; U1.J7@6014.57,1586.61 v1(6027.36,1573.82) ; U1.L7@6014.57,1637.8 v1(6027.36,1650.59) ; U1.M7@6014.57,1663.39 v1(6027.36,1676.18) ; U1.N7@6014.57,1688.98 v1(6027.36,1701.77) ; U1.P7@6014.57,1714.57 v1(6027.36,1727.36) ; U1.D6@6040.16,1458.66 v1(6052.95,1445.87) ; U1.U6@6040.16,1791.34 v1(6052.95,1804.13) ; U1.F5@6065.75,1509.84 v1(6078.54,1497.05) ; U1.R5@6065.75,1740.16 v1(6078.54,1752.95) ; U1.C4@6091.34,1433.07 v1(6104.13,1420.27) ; U1.V4@6091.34,1816.93 v1(6104.13,1829.73) ; U1.C3@6116.93,1433.07 v1(6129.73,1420.27) ; U1.E3@6116.93,1484.25 v1(6129.73,1471.46) ; U1.F3@6116.93,1509.84 v1(6129.73,1497.05) ; U1.H3@6116.93,1561.02 v1(6129.73,1548.23) ; U1.K3@6116.93,1612.2 v1(6129.73,1599.41) ; U1.L3@6116.93,1637.8 v1(6129.73,1650.59) ; U1.N3@6116.93,1688.98 v1(6129.73,1701.77) ; U1.R3@6116.93,1740.16 v1(6129.73,1752.95) ; U1.T3@6116.93,1765.75 v1(6129.73,1778.54) ; U1.V3@6116.93,1816.93 v1(6129.73,1829.73) ; U2.T9@6263.78,1499.02 6273.13,1489.67 v1(6273.13,1480) ; U2.T1@6263.78,1750.98 6264.02,1750.98 v1(6280,1735) ; v1(6325,1480) 6326.77,1481.77 U2.P9@6326.77,1499.02 ; v1(6340,1735) 6340,1737.76 U2.P1@6326.77,1750.98 6341.54,1765.75 6375,1765.75 U2.M1@6389.76,1750.98 ; U2.M9@6389.76,1499.02 6389.76,1480.24 v1(6390,1480) ; U2.J8@6484.25,1530.51 6500,1514.76 6500,1469.24 v1(6497.5,1466.74) 6514.97,1466.74 U2.G9@6547.24,1499.02 ; U2.J2@6484.25,1719.49 6478.48,1725.26 6478.48,1735.87 6469.48,1744.87 6469.48,1759.48 6475,1765 cw(c6475.75,1765) 6475.75,1765.75 6480.18,1765.75 6489.43,1775 v1(6495,1775) ; U2.G8@6547.24,1530.51 U2.G9@6547.24,1499.02 ; U2.G1@6547.24,1750.98 6547.24,1772.24 v1(6570,1795) ; U2.E2@6610.24,1719.49 U2.E1@6610.24,1750.98 U2.D1@6641.73,1750.98 6641.73,1772.09 v1(6640,1773.82) ; U2.D8@6641.73,1530.51 U2.E8@6610.24,1530.51 U2.F9@6578.74,1499.02 U2.G9@6547.24,1499.02 ; U2.B9@6704.72,1499.02 U2.A9@6736.22,1499.02 6736.22,1498.78 v1(6750,1485) ; U2.B3@6704.72,1687.99 6720,1703.27 6720,1735.71 U2.B1@6704.72,1750.98 6722.5,1768.76 v1(6722.5,1769.82)
  Solder Side w5: U3.T1@6263.78,1499.02 6273.13,1489.67 v1(6273.13,1480) ; U3.T9@6263.78,1750.98 6264.02,1750.98 v1(6280,1735) ; v1(6325,1480) 6326.77,1481.77 U3.P1@6326.77,1499.02 ; v1(6340,1735) 6340,1737.76 U3.P9@6326.77,1750.98 6341.54,1765.75 6375,1765.75 U3.M9@6389.76,1750.98 ; U3.M1@6389.76,1499.02 6389.76,1480.24 v1(6390,1480) ; U3.J2@6484.25,1530.51 6469.48,1515.74 6469.48,1506.28 6470.06,1505.7 6469.48,1505.13 6469.48,1492.9 6470.06,1492.33 6495.64,1466.74 v1(6497.5,1466.74) ; U3.J8@6484.25,1719.49 6500,1735.24 6500,1770 v1(6495,1775) ; U3.G1@6547.24,1499.02 6547.24,1447.76 v1(6560,1435) ; U3.G8@6547.24,1719.49 U3.G9@6547.24,1750.98 ; v1(6570,1795) 6547.24,1772.24 U3.G9@6547.24,1750.98 ; U3.F9@6578.74,1750.98 U3.G9@6547.24,1750.98 ; U3.E2@6610.24,1530.51 U3.E1@6610.24,1499.02 6615,1494.25 v1(6615,1475) ; U3.E8@6610.24,1719.49 U3.D8@6641.73,1719.49 6656.5,1734.26 6656.5,1763.5 6646.18,1773.82 v1(6640,1773.82) ; U3.D1@6641.73,1499.02 6655,1485.75 v1(6655,1475) ; U3.B1@6704.72,1499.02 6719.49,1484.25 6749.25,1484.25 v1(6750,1485) ; U3.B3@6704.72,1562.01 6717.72,1575 v1(6720,1575) ; U3.B9@6704.72,1750.98 U3.A9@6736.22,1750.98 6736.22,1753.78 6722.5,1767.5 v1(6722.5,1769.82)
  other v2: 7968.35,1135 8011.65,1135 10445.32,1169.57 10484.68,1169.57 10445.32,1205 10484.68,1205 10445.32,1240.43 10484.68,1240.43 10320.31,2605.32 10359.68,2605.32 10320.31,2644.69 10359.68,2644.69
  other v3: 8850.32,2510.32 8889.68,2510.32 8870,2530 8850.32,2549.68 8889.68,2549.68
I2C_SCL: R20.1 U1.B20
I2C_SDA: R21.1 U1.D19
NetAE1_1: AE1.1 C72.2 L5.1
NetC1_2: C1.2 R34.2 U1.T19 Y1.1
NetC2_2: C2.2 U1.T20 Y1.3
NetC3_2: C3.2 U1.Y17 Y2.1
NetC4_2: C4.2 U1.W17 Y2.2
NetC6_2: C6.2 U4.3
NetC33_2: C33.2 C34.2 U1.V17 | length 18.1
  Component Side w5: v1(5745.87,1829.73) U1.V17@5758.66,1816.93
NetC38_2: C38.2 C39.2 C40.2 C41.2 C42.2 U1.C16 U1.D16 U1.H10 U1.H11 U1.H12 U1.H13 U1.J13 U1.K13 U1.L13 | length 162.9
  Component Side w5: v1(5771.46,1420.27) U1.C16@5784.25,1433.07 ; v1(5771.46,1445.87) U1.D16@5784.25,1458.66 ; v1(5848.23,1548.23) U1.H13@5861.02,1561.02 ; v1(5848.23,1573.82) U1.J13@5861.02,1586.61 ; v1(5848.23,1599.41) U1.K13@5861.02,1612.2 ; v1(5848.23,1650.59) U1.L13@5861.02,1637.8 ; v1(5873.82,1548.23) U1.H12@5886.61,1561.02 ; v1(5899.41,1548.23) U1.H11@5912.2,1561.02 ; U1.H10@5937.8,1561.02 v1(5950.59,1548.23)
NetC47_2: C47.2 C48.2 C49.2 C50.2 C51.2 C52.2 U1.H8 U1.H9 U1.J8 U1.K8 U1.L8 U1.M8 U1.M13 U1.N8 U1.N9 U1.N10 U1.N11 U1.N12 U1.V9 | length 217.2
  Component Side w5: v1(5848.23,1676.18) U1.M13@5861.02,1663.39 ; v1(5873.82,1701.77) U1.N12@5886.61,1688.98 ; v1(5899.41,1701.77) U1.N11@5912.2,1688.98 ; U1.N10@5937.8,1688.98 v1(5950.59,1701.77) ; U1.H9@5963.39,1561.02 v1(5976.18,1548.23) ; U1.N9@5963.39,1688.98 v1(5976.18,1701.77) ; U1.V9@5963.39,1816.93 v1(5976.18,1829.73) ; U1.H8@5988.98,1561.02 v1(6001.77,1548.23) ; U1.J8@5988.98,1586.61 v1(6001.77,1573.82) ; U1.L8@5988.98,1637.8 v1(6001.77,1650.59) ; U1.M8@5988.98,1663.39 v1(6001.77,1676.18) ; U1.N8@5988.98,1688.98 v1(6001.77,1701.77)
NetC53_2: C53.2 U1.L18 | length 18.1
  Component Side w5: v1(5720.27,1650.59) U1.L18@5733.07,1637.8
NetC58_2: C58.2 C59.2 U1.U18 | length 18.1
  Component Side w5: v1(5720.27,1804.13) U1.U18@5733.07,1791.34
NetC60_2: C60.2 U1.T18 | length 18.1
  Component Side w5: v1(5720.27,1778.54) U1.T18@5733.07,1765.75
NetC66_2: C66.2 R22.1 U7.2 U7.9
NetC71_2: C71.2 U8.9
NetC73_2: C73.2 L5.2 U9.41
NetC75_1: C75.1 L6.1 U9.31
NetC78_1: C78.1 U10.3 U10.9
NetC79_2: C79.2 U11.21 Y3.1
NetC80_2: C80.2 U11.22 Y3.3
NetC82_2: C82.2 U11.10
NetJP1_2: JP1.D- U11.19
NetJP1_3: JP1.D+ U11.20
NetL1_1: L1.1 U6.1
NetL2_1: L2.1 U7.4
NetL3_1: L3.1 U7.7
NetL4_1: L4.1 U8.1 U8.2 U8.3
NetL6_2: L6.2 U9.34
NetQ1_1: Q1.1 R3.2 SW1.3 SW1.4 U1.Y16
NetQ1_3: Q1.3 R2.1 U1.W16
NetR5_1: R5.1 R6.2 U4.2
NetR7_1: R7.1 U2.L8 | length 134.2
  Component Side w5: U2.L8@6421.26,1530.51 6421.26,1526.01 6436.03,1511.24 6436.03,1492.9 6432.5,1489.37 6432.5,1424.78 R7.1@6447.28,1410
NetR12_2: R12.2 U1.H2 | length 18.1
  Component Side w5: U1.H2@6142.52,1561.02 v1(6155.32,1548.23)
NetR13_1: R13.1 U3.L8 | length 143.7
  Solder Side w5: U3.L8@6421.26,1719.49 6427.03,1725.26 6427.03,1735.87 6436.03,1744.87 6436.03,1755.14 6446.64,1765.75 6446.64,1766.23 6462.5,1782.09 6462.5,1825.22 R13.1@6477.28,1840
NetR14_1: R14.1 U1.F12 U9.22 | length 18.1
  Component Side w5: v1(5873.82,1497.05) U1.F12@5886.61,1509.84
NetR15_1: R15.1 U1.E13 U9.24 | length 18.1
  Component Side w5: v1(5848.23,1471.46) U1.E13@5861.02,1484.25
NetR16_1: R16.1 U1.E14 U9.26 | length 18.1
  Component Side w5: v1(5822.64,1471.46) U1.E14@5835.43,1484.25
NetR17_1: R17.1 U1.F10 U9.23 | length 18.1
  Component Side w5: U1.F10@5937.8,1509.84 v1(5950.59,1497.05)
NetR18_1: R18.1 U1.F11 U9.25 | length 18.1
  Component Side w5: v1(5899.41,1497.05) U1.F11@5912.2,1509.84
NetR19_1: R19.1 U1.E12 | length 18.1
  Component Side w5: v1(5873.82,1471.46) U1.E12@5886.61,1484.25
NetR19_2: R19.2 U9.20
NetR23_1: R23.1 R24.2 U8.5
NetR25_2: R25.2 U1.V5 | length 74.6
  Component Side w5: v4(6050,1885) 6054.33,1880.67 6054.33,1828.35 U1.V5@6065.75,1816.93
NetR26_2: R26.2 U10.1
NetR27_2: R27.2 U10.12
NetR28_2: R28.2 U11.24
NetR29_1: R29.1 U11.17
NetR30_1: R30.1 R31.2 U11.16
NetR32_2: R32.2 U11.14
NetR33_2: R33.2 U11.13
NetU1_A13: U1.A13 U5.5
NetU1_B13: U1.B13 U5.1
NetU1_B15: U1.B15 U5.6
NetU1_B17: U1.B17 U5.2
PWR_GOOD: SW2.2 U4.4 U7.8 U8.4
RESET: C5.2 R4.1 U1.R16 U4.6 U10.2 U11.15 | length 18.1
  Component Side w5: v1(5771.46,1752.95) U1.R16@5784.25,1740.16
UART_RX: U1.B18 U10.10
UART_TX: U1.E16 U10.7
USB_OTG_N: U1.V19 U11.2
USB_OTG_P: U1.V20 U11.3
USB_UART_DM: R26.1 U11.4
USB_UART_DP: R27.1 U11.5
VBAT: C61.2 C64.2 C67.2 C68.2 U6.4 U6.5 U7.3 U7.6 U8.10 U8.11 U8.12
VUSB: C32.2 C77.1 JP1.VBUS R30.2 U1.W20 U10.4
pads on no net: AE1.2 AE1.3 AE1.4 JP1.ID JP1.MT2 JP1.P$1 JP1.P$2 SW2.1 SW2.4 U1.A5 U1.A6 U1.A8 U1.A14 U1.A15 U1.A16 U1.A17 U1.A18 U1.A19 U1.B5 U1.B6 U1.B7 U1.B14 U1.B16 U1.B19 U1.C6 U1.C7 U1.C8 U1.C9 U1.C10 U1.C13 U1.C14 U1.C15 U1.C17 U1.C19 U1.C20 U1.D5 U1.D13 U1.D14 U1.D17 U1.D18 U1.D20 U1.E5 U1.E6 U1.E7 U1.E9 U1.E10 U1.E15 U1.E17 U1.E18 U1.E19 U1.E20 U1.F7 U1.F9 U1.F16 U1.F18 U1.F19 U1.F20 U1.G16 U1.G17 U1.G20 U1.H16 U1.H19 U1.J5 U1.J15 U1.J16 U1.J18 U1.K2 U1.K15 U1.K16 U1.K17 U1.K18 U1.K19 U1.K20 U1.L15 U1.L16 U1.L17 U1.L19 U1.M18 U1.M19 U1.N14 U1.N15 U1.N16 U1.N20 U1.P13 U1.P14 U1.P15 U1.P16 U1.P19 U1.P20 U1.R7 U1.R8 U1.R9 U1.R10 U1.R11 U1.R14 U1.R15 U1.T5 U1.T6 U1.T7 U1.T8 U1.T10 U1.T11 U1.T13 U1.T14 U1.T15 U1.T17 U1.U5 U1.U7 U1.U8 U1.U10 U1.U11 U1.U13 U1.U14 U1.U16 U1.U17 U1.V6 U1.V7 U1.V8 U1.V10 U1.V11 U1.V12 U1.V16 U1.W5 U1.W6 U1.W7 U1.W8 U1.W9 U1.W10 U1.W11 U1.W12 U1.W13 U1.W14 U1.W15 U1.W19 U1.Y5 U1.Y6 U1.Y7 U1.Y8 U1.Y9 U1.Y10 U1.Y11 U1.Y12 U1.Y13 U1.Y14 U1.Y19 U2.J1 U2.J9 U2.L1 U2.L9 U2.M7 U3.J1 U3.J9 U3.L1 U3.L9 U3.M7 U4.7@7972.28,1135 U4.7@8007.72,1135 U5.3 U5.7 U6.7@11365,2622.28 U6.7@11365,2657.72 U8.17@8870,2530 U9.2 U9.3 U9.4 U9.5 U9.6 U9.7 U9.8 U9.9 U9.10 U9.11 U9.13 U9.15 U9.16 U9.17 U9.18 U9.27 U9.28 U9.38 U9.39 U10.6 U10.8 U10.11 U11.6 U11.7 U11.8 U11.11 U11.12 U11.23

## Polygon pours and split planes (outlines as drawn)
GND on Ground Plane (GND) (split plane): 6924.9,1020.1 965.1,1020.1 965.1,4979.9 6924.9,4979.9
1V4 on Power Plane (VCC) (split plane): 6924.9,1020.1 965.1,1020.1 965.1,4979.9 6924.9,4979.9